# Altium PCB PCB_SMPS.PcbDoc
Units mm, origin at the board's own origin, x right, y up, seen from the top; angles counter-clockwise.
Board outline 94 x 42 mm, 2 copper layers (Top Layer, Bottom Layer); 5 components, 4 nets, 18 pads, 433 vias.
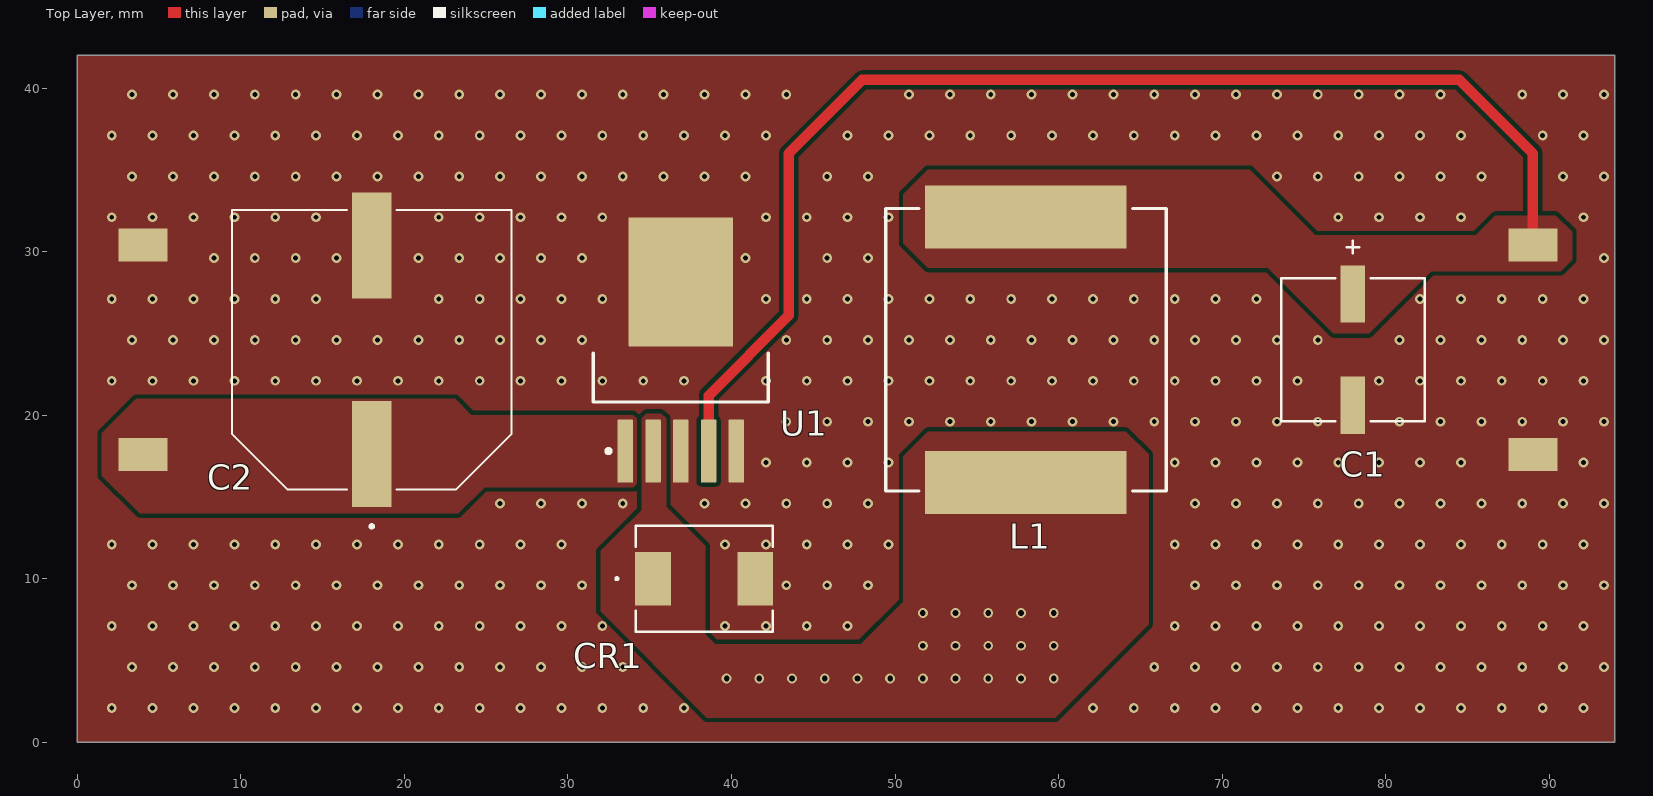
[diagram p0: Top Layer view]
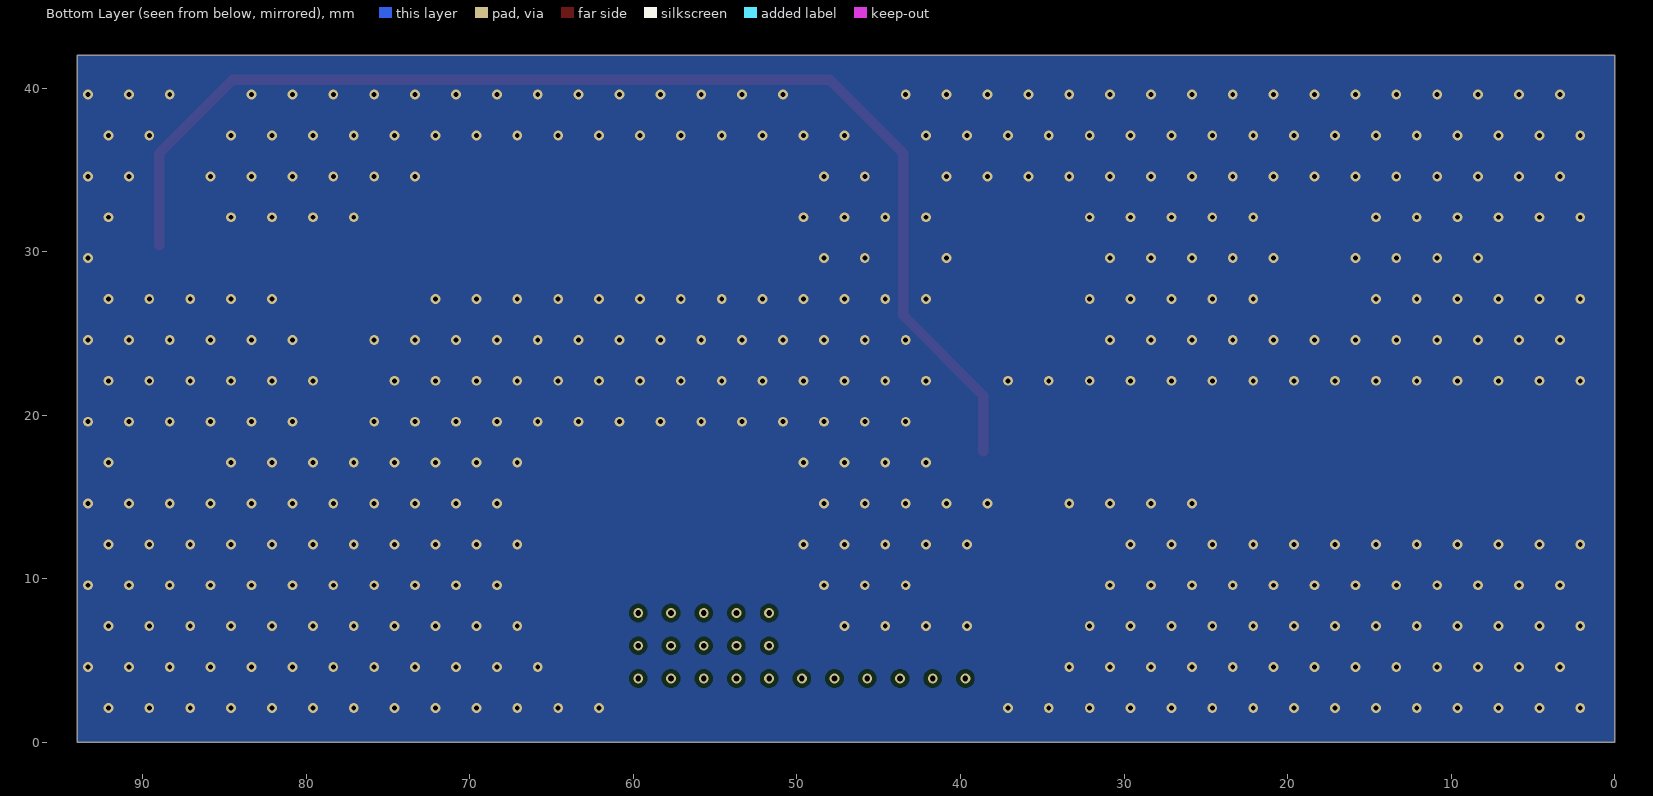
[diagram p1: Bottom Layer view, seen from below]
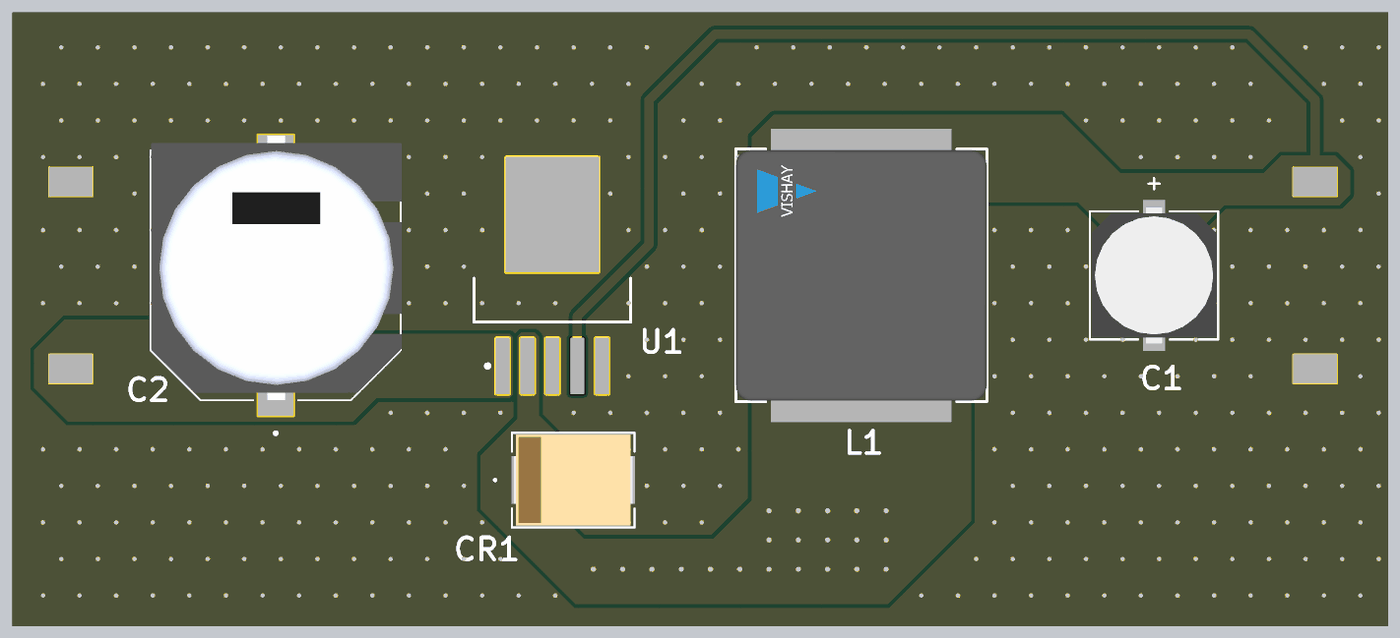
[diagram p2: 3D render of the assembled board from above, using the file's embedded part models]

## Layer stack, top to bottom
Top Solder: solder mask 0.0102, Solder Resist, Dk 3.5
Top Layer: signal copper 0.0356
Dielectric 1: dielectric 0.32, FR-4, Dk 4.8
Bottom Layer: signal copper 0.0356
Bottom Solder: solder mask 0.0102, Solder Resist, Dk 3.5

## Board outline
0,0 0,42 94,42 94,0

## Design rules (kind name [scope] priority, off if disabled: settings)
Clearance [All] p1: gap=0.254 ignorepadtopadclearanceinfootprint=FALSE except(0: Arc-Hole Track-Hole SMDPad-Hole THPad-Hole Via-Hole Fill-Hole Poly-Hole Region-Hole Text-Hole)
PolygonConnect [All] p1: connectstyle=Relief reliefconductorwidth=0.254 reliefentries=4 polygonreliefangle="90 Angle" airgapwidth=0.254
RoutingVias [All] p1: holewidth=0.711 width=1.27 viastyle="Through Hole" minholewidth=0.711 minwidth=1.27 maxholewidth=0.711 maxwidth=1.27
SolderMaskExpansion [All] p1: expansion=0.102 istentingtop=FALSE
Width [All] p1: maxlimit=2.032 minlimit=0.254 preferedwidth=1.016 minimp=50.000000 maximp=50.000000 favimp=50.000000
30 further rules are at their usual default settings.

## Components (designator, comment, footprint, x,y, rotation, side; value= is the part's Value field where it differs from the comment)
C1 "220uF" PCAP_8x10-ELECT_NCA 78,24 r270 top
C2 "470uF" CAPAE1710X1750N 18,24 r90 top
CR1 "SK54L-TP" SDO_SMC-DO-214AB_MCE 38.324,10 r0 top
L1 "68uH" FP-IHLP-6767GZ-FP_3_825x1-MFG 58,24 r90 top
U1 "LM2596S-5.0/NOPB" KTT0005B_L 36.9,24 r90 top

## Footprints (in the part's own frame and the unit in brackets; to place one, negate y for a bottom-side part, rotate by r counter-clockwise, add the part's x,y. Pads: shape width x height; smd on the part's side, far side on the other; paste and mask are expansions set on the pad)
CAPAE1710X1750N [mm]
  rect 6.46x2.42 smd: 1(-6.375,0) 2(6.375,0)
  silkscreen extent -10.9,-8.55 8.55,8.55, body extent -8.54,-8.59 9.56,8.51, height 17.5
FP-IHLP-6767GZ-FP_3_825x1-MFG [mm]
  rect 3.825x12.32 smd paste+0 mask+0: 1(-8.117,0) 2(8.117,0)
  silkscreen extent -8.64,-8.57 8.64,8.57, body extent -10.13,-8.67 10.13,8.67, height 0.25
KTT0005B_L [mm] "DPAK, 5-Leads, Body 10.65x9.65mm, Pitch 1.7mm, IPC High Density"
  rrect11% 3.85x0.95 smd: 1(-6.2,3.4) 2(-6.2,1.7) 3(-6.2,0) 4(-6.2,-1.7) 5(-6.2,-3.4)
  rrect2% 7.9x6.4 smd: 6(4.15,0)
  silkscreen extent -6.32,-5.35 -0.2,5.35, body extent -3.2,-5.32 6.45,5.33, height 4.83
PCAP_8x10-ELECT_NCA [mil]
  rect 138x59 smd paste+0 mask+0: 1(-134,0) 2(134,0)
  silkscreen extent -262,-173 173,173, body extent -183,-167 183,167, height 407
SDO_SMC-DO-214AB_MCE [mil]
  rect 86x128 smd paste+0 mask+0: 1(-123,0) 2(123,0)
  silkscreen extent -213,-128 165,128, body extent -160,-123 160,123, height 105

## Part data
C1: library part UWZ1E221MCL1GS, "No Description Available", Mfr_Name=Nichicon
C2: library part UCZ1H471MNQ1MS, "470ÂµF 50V Aluminum Electrolytic Capacitors Radial, Can - SMD 80mOhm @ 100kHz 3500 Hrs @ 125Â°C", Package="Radial Nichicon", Availability=Unavailable, MF=Nichicon, MP=UCZ1H471MNQ1MS, Price=None, SnapEDA_Link=https://www.snapeda.com/parts/UCZ1H471MNQ1MS/Nichicon/view-part/2424952/?ref=snap
CR1: "No Description Available", Mfr_Name=MCC
L1: library part CMP-02424-000344-1, "Commercial Inductors, Low DCR Series 68uH 6.1A 75.7mΩ 20%", Case/Package=6767, Current Rating=6.1A, DC Resistance (DCR)=75.7mR, Max DC Current=4.5A, Max Operating Temperature=125°C, Min Operating Temperature=-55°C, Package Quantity=200, Self Resonant Frequency=3MHz, Test Frequency=100kHz, Tolerance=20%, Core Material=Metal, Depth=17.15mm, Height=7mm, Height - Seated (Max)=0.276inch, Lead Free="Lead Free", Length=17.15mm, Military Standard=Not, Mount="Surface Mount", Number of Pins=2, Packaging="Tape and Reel", Radiation Hardening=No, RMS Current (Irms)=6.1A, Saturation Current=4.5A, Shielding=Shielded, Termination=SMD/SMT, Width=17.15mm, Inductance=68uH, Inductance Tolerance=20%
U1: library part CMP-0069-00269-3, "SIMPLE SWITCHER® Power Converter 150 KHz 3A Step-Down Voltage Regulator, 5-pin TO-263, Pb-Free", Manufacturer="Texas Instruments", PackageTopMarking="NSUZXYTTE#*LM2596S*-5.0 P+", PowerWise=N, Code_JEDEC=MO-169-AB, ComponentLink1Description="Datasheet URL", ComponentLink1URL=http://www.ti.com/general/docs/lit/getliterature.tsp?genericPartNumber=LM2596&fileType=pdf, CompType=Switcher, PackageDescription="TO-263, Molded, .400 x .390 x .180in, 5 Lead, .067in Pitch, Surface Mount", PackageReference=KTT0005B, PinCount=5, RoHS=Y

## Free pads (board coordinates)
  rect 3x2 smd mask+0.05: 1(4,30.4) 1(89,30.4) 2(4,17.6) 2(89,17.6)

## Via types
v1: diameter 0.6, hole 0.3, Top Layer to Bottom Layer, tented both sides, 412 vias
v2: diameter 0.6, hole 0.35, Top Layer to Bottom Layer, tented both sides, 21 vias

## Nets (pads, with @x,y where several pads share a name; then routed paths per layer and width w, separated by ;. In a path a pad name is that pad's centre, name@x,y a point inside that pad or via, vN(x,y) a via of type N, cw(c..) or ccw(c..) an arc to the next point about the centre after c; other vN are vias at no path point)
+5: C1.1 L1.2 pad.1@89,30.4 U1.4 | length 75.1
  Top Layer w0.635: U1.4 38.6,21.2 43.5,26.1 43.5,36 48,40.5 84.5,40.5 89,36 pad.1@89,30.4
+12: C2.1 pad.2@4,17.6 U1.1
GND: C1.2 C2.2 CR1.2 pad.1@4,30.4 pad.2@89,17.6 U1.3 U1.5 U1.6
  other v1: 2.1,2.1 4.6,2.1 7.1,2.1 9.6,2.1 12.1,2.1 14.6,2.1 17.1,2.1 19.6,2.1 22.1,2.1 24.6,2.1 27.1,2.1 29.6,2.1 32.1,2.1 34.6,2.1 37.1,2.1 62.1,2.1 64.6,2.1 67.1,2.1 69.6,2.1 72.1,2.1 74.6,2.1 77.1,2.1 79.6,2.1 82.1,2.1 84.6,2.1 87.1,2.1 89.6,2.1 92.1,2.1 3.35,4.6 5.85,4.6 8.35,4.6 10.85,4.6 13.35,4.6 15.85,4.6 18.35,4.6 20.85,4.6 23.35,4.6 25.85,4.6 28.35,4.6 30.85,4.6 33.35,4.6 65.85,4.6 68.35,4.6 70.85,4.6 73.35,4.6 75.85,4.6 78.35,4.6 80.85,4.6 83.35,4.6 85.85,4.6 88.35,4.6 90.85,4.6 93.35,4.6 2.1,7.1 4.6,7.1 7.1,7.1 9.6,7.1 12.1,7.1 14.6,7.1 17.1,7.1 19.6,7.1 22.1,7.1 24.6,7.1 27.1,7.1 29.6,7.1 32.1,7.1 39.6,7.1 42.1,7.1 44.6,7.1 47.1,7.1 67.1,7.1 69.6,7.1 72.1,7.1 74.6,7.1 77.1,7.1 79.6,7.1 82.1,7.1 84.6,7.1 87.1,7.1 89.6,7.1 92.1,7.1 3.35,9.6 5.85,9.6 8.35,9.6 10.85,9.6 13.35,9.6 15.85,9.6 18.35,9.6 20.85,9.6 23.35,9.6 25.85,9.6 28.35,9.6 30.85,9.6 43.35,9.6 45.85,9.6 48.35,9.6 68.35,9.6 70.85,9.6 73.35,9.6 75.85,9.6 78.35,9.6 80.85,9.6 83.35,9.6 85.85,9.6 88.35,9.6 90.85,9.6 93.35,9.6 2.1,12.1 4.6,12.1 7.1,12.1 9.6,12.1 12.1,12.1 14.6,12.1 17.1,12.1 19.6,12.1 22.1,12.1 24.6,12.1 27.1,12.1 29.6,12.1 39.6,12.1 42.1,12.1 44.6,12.1 47.1,12.1 49.6,12.1 67.1,12.1 69.6,12.1 72.1,12.1 74.6,12.1 77.1,12.1 79.6,12.1 82.1,12.1 84.6,12.1 87.1,12.1 89.6,12.1 92.1,12.1 25.85,14.6 28.35,14.6 30.85,14.6 33.35,14.6 38.35,14.6 40.85,14.6 43.35,14.6 45.85,14.6 48.35,14.6 68.35,14.6 70.85,14.6 73.35,14.6 75.85,14.6 78.35,14.6 80.85,14.6 83.35,14.6 85.85,14.6 88.35,14.6 90.85,14.6 93.35,14.6 42.1,17.1 44.6,17.1 47.1,17.1 49.6,17.1 67.1,17.1 69.6,17.1 72.1,17.1 74.6,17.1 77.1,17.1 79.6,17.1 82.1,17.1 84.6,17.1 92.1,17.1 43.35,19.6 45.85,19.6 48.35,19.6 50.85,19.6 53.35,19.6 55.85,19.6 58.35,19.6 60.85,19.6 63.35,19.6 65.85,19.6 68.35,19.6 70.85,19.6 73.35,19.6 75.85,19.6 80.85,19.6 83.35,19.6 85.85,19.6 88.35,19.6 90.85,19.6 93.35,19.6 2.1,22.1 4.6,22.1 7.1,22.1 9.6,22.1 12.1,22.1 14.6,22.1 17.1,22.1 19.6,22.1 22.1,22.1 24.6,22.1 27.1,22.1 29.6,22.1 32.1,22.1 34.6,22.1 37.1,22.1 42.1,22.1 44.6,22.1 47.1,22.1 49.6,22.1 52.1,22.1 54.6,22.1 57.1,22.1 59.6,22.1 62.1,22.1 64.6,22.1 67.1,22.1 69.6,22.1 72.1,22.1 74.6,22.1 79.6,22.1 82.1,22.1 84.6,22.1 87.1,22.1 89.6,22.1 92.1,22.1 3.35,24.6 5.85,24.6 8.35,24.6 10.85,24.6 13.35,24.6 15.85,24.6 18.35,24.6 20.85,24.6 23.35,24.6 25.85,24.6 28.35,24.6 30.85,24.6 43.35,24.6 45.85,24.6 48.35,24.6 50.85,24.6 53.35,24.6 55.85,24.6 58.35,24.6 60.85,24.6 63.35,24.6 65.85,24.6 68.35,24.6 70.85,24.6 73.35,24.6 75.85,24.6 80.85,24.6 83.35,24.6 85.85,24.6 88.35,24.6 90.85,24.6 93.35,24.6 2.1,27.1 4.6,27.1 7.1,27.1 9.6,27.1 12.1,27.1 14.6,27.1 22.1,27.1 24.6,27.1 27.1,27.1 29.6,27.1 32.1,27.1 42.1,27.1 44.6,27.1 47.1,27.1 49.6,27.1 52.1,27.1 54.6,27.1 57.1,27.1 59.6,27.1 62.1,27.1 64.6,27.1 67.1,27.1 69.6,27.1 72.1,27.1 82.1,27.1 84.6,27.1 87.1,27.1 89.6,27.1 92.1,27.1 8.35,29.6 10.85,29.6 13.35,29.6 15.85,29.6 20.85,29.6 23.35,29.6 25.85,29.6 28.35,29.6 30.85,29.6 40.85,29.6 45.85,29.6 48.35,29.6 93.35,29.6 2.1,32.1 4.6,32.1 7.1,32.1 9.6,32.1 12.1,32.1 14.6,32.1 22.1,32.1 24.6,32.1 27.1,32.1 29.6,32.1 32.1,32.1 42.1,32.1 44.6,32.1 47.1,32.1 49.6,32.1 77.1,32.1 79.6,32.1 82.1,32.1 84.6,32.1 92.1,32.1 3.35,34.6 5.85,34.6 8.35,34.6 10.85,34.6 13.35,34.6 15.85,34.6 18.35,34.6 20.85,34.6 23.35,34.6 25.85,34.6 28.35,34.6 30.85,34.6 33.35,34.6 35.85,34.6 38.35,34.6 40.85,34.6 45.85,34.6 48.35,34.6 73.35,34.6 75.85,34.6 78.35,34.6 80.85,34.6 83.35,34.6 85.85,34.6 90.85,34.6 93.35,34.6 2.1,37.1 4.6,37.1 7.1,37.1 9.6,37.1 12.1,37.1 14.6,37.1 17.1,37.1 19.6,37.1 22.1,37.1 24.6,37.1 27.1,37.1 29.6,37.1 32.1,37.1 34.6,37.1 37.1,37.1 39.6,37.1 42.1,37.1 47.1,37.1 49.6,37.1 52.1,37.1 54.6,37.1 57.1,37.1 59.6,37.1 62.1,37.1 64.6,37.1 67.1,37.1 69.6,37.1 72.1,37.1 74.6,37.1 77.1,37.1 79.6,37.1 82.1,37.1 84.6,37.1 89.6,37.1 92.1,37.1 3.35,39.6 5.85,39.6 8.35,39.6 10.85,39.6 13.35,39.6 15.85,39.6 18.35,39.6 20.85,39.6 23.35,39.6 25.85,39.6 28.35,39.6 30.85,39.6 33.35,39.6 35.85,39.6 38.35,39.6 40.85,39.6 43.35,39.6 50.85,39.6 53.35,39.6 55.85,39.6 58.35,39.6 60.85,39.6 63.35,39.6 65.85,39.6 68.35,39.6 70.85,39.6 73.35,39.6 75.85,39.6 78.35,39.6 80.85,39.6 83.35,39.6 88.35,39.6 90.85,39.6 93.35,39.6
NetCR1_1: CR1.1 L1.1 U1.2
  other v2: 39.7,3.9 41.7,3.9 43.7,3.9 45.7,3.9 47.7,3.9 49.7,3.9 51.7,3.9 53.7,3.9 55.7,3.9 57.7,3.9 59.7,3.9 51.7,5.9 53.7,5.9 55.7,5.9 57.7,5.9 59.7,5.9 51.7,7.9 53.7,7.9 55.7,7.9 57.7,7.9 59.7,7.9

## Polygon pours and split planes (outlines as drawn)
GND on Top Layer "NONET_L-01_P-001" (solid, pour order 4): 0,0 94,0 94,42 0,42
+5 on Top Layer "NONET_L-01_P-001" (solid, pour order 3): 52,35 50.5,33.5 50.5,30.5 52,29 72.8,29 76.8,25 79,25 82.8,28.8 90.7,28.8 91.4,29.5 91.4,31.2 90.4,32.2 86.7,32.2 85.5,31 79.9,31 75.7,31 71.7,35
NetCR1_1 on Top Layer "NONET_L-01_P-001" (solid, pour order 1): 34.5,19.8 34.8,20.1 35.7,20.1 36,19.8 36,14.4 38.4,12 38.4,6.6 39,6 47.9,6 50.5,8.6 50.5,17.5 52,19 64.1,19 65.5,17.6 65.5,7.2 59.8,1.5 38.5,1.5 32,8 32,11.7 32.8,12.5 34.5,14.2
+12 on Top Layer "NONET_L-01_P-001" (solid, pour order 0): 34,15.6 34.2,15.8 34.2,19.8 34,20 24.1,20 23.1,21 3.6,21 1.5,18.9 1.5,16.3 3.8,14 23.3,14 24.9,15.6
GND on Bottom Layer "NONET_L-01_P-001" (solid, pour order 5): 0,0 94,0 94,42 0,42